# EAGLE board FPC_10pin0p5mm (EAGLE 9.5.0)
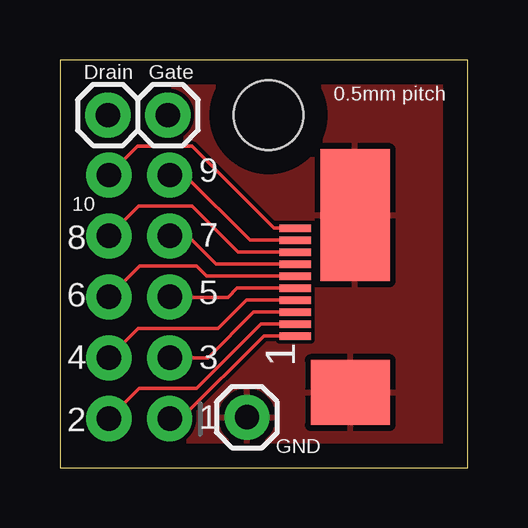
[diagram p0: board, top side]
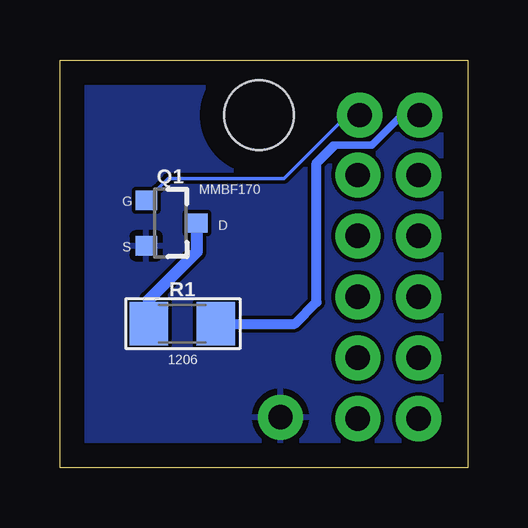
[diagram p1: board, bottom side, seen from below]

Size 17 x 17 mm. Coordinates in mm from the lower left corner, seen from the top.
Outline: 0,0 17,0 17,17 0,17 0,0
Copper layers (1*16): Top 0.035mm / dielectric 1.5mm / Bottom 0.035mm
Design rules "default": minimum track width 6mil, minimum drill 0.35mm, track to track 6mil, track to pad 6mil, pad to pad 6mil, via to via 6mil, smd to smd 6mil, copper to edge 40mil, drill to drill 6mil, minimum pad ring 10mil, minimum via ring 8mil, stop-mask expansion 4mil, vias tented up to drill 0mil, thermal gap 10mil
Holes 2.9 mm at 8.7,14.7

## Footprints (pad centres in the part's own frame; a part is rotated, then mirrored left to right if it is on the bottom)
KYOCERA046288 = smd 0.3 x 1.3: P$1 0,0.65; P$2 0.5,0.65; P$3 1,0.65; P$4 1.5,0.65; P$5 2,0.65; P$6 2.5,0.65; P$7 3,0.65; P$8 3.5,0.65; P$9 4,0.65; P$10 4.5,0.65 | smd 2.7 x 3.3: P$11 -2.35,-1.65 | smd 5.5 x 2.9: P$12 5.05,-1.85
2X5_NOSILK = drill 1.016 pad 1.88: 1 0,0; 2 0,2.54; 3 2.54,0; 4 2.54,2.54; 5 5.08,0; 6 5.08,2.54; 7 7.62,0; 8 7.62,2.54; 9 10.16,0; 10 10.16,2.54
1X01 = drill 1.016 pad 1.88: 1 0,0
MMBF170 = smd 0.8 x 0.9: 1 -0.95,-1; 2 0.95,-1; 3 0,1.1
R1206 = smd 1.6 x 1.8: 1 -1.4,0; 2 1.4,0

## Placement (x,y rotation side)
J1  J1  [KYOCERA046288]  10.46,5.48 90 top
J2  J2  [2X5_NOSILK]  4.58,2.04 90 top
J3  J3  [1X01]  2,14.7 0 top
J4  J4  [1X01]  4.5,14.7 0 top
J5  J5  [1X01]  7.8,2.1 0 top
Q1  MMBF170  [MMBF170]  12.4,10.2 270 bottom
R1  1206  [R1206]  11.9,6 0 bottom

## Library data of the parts
J1 = Kyocera046288
J2-J5 = SparkFun-Connectors
Q1 = MMBF170
R1 = R1206

## Nets
GND: J1.P$11 J1.P$12 J5.1 Q1.2
N$1: J1.P$1 J2.1
N$2: J1.P$2 J2.2
N$3: J1.P$3 J2.3
N$4: J1.P$4 J2.4
N$5: J1.P$5 J2.5
N$6: J1.P$6 J2.6
N$7: J1.P$7 J2.7
N$8: J1.P$8 J2.8
N$9: J1.P$9 J2.9
N$10: J1.P$10 J2.10
N$11: Q1.3 R1.1
N$12: J3.1 R1.2
N$13: J4.1 Q1.1

## Tracks (layer width: path | path; a pad name or v marks a point on that pad's centre or on a via)
GND
  pour Top: 0,0 0,17 17,17 17,0
  pour Bottom: 0,0 0,17 17,17 17,0
N$1
  Top 0.152: J1.P$1 8.52,5.48 8.5,5.5 5.04,2.04 J2.1
N$2
  Top 0.152: J1.P$2 8.38,5.98 5.7,3.3 3.3,3.3 J2.2
N$3
  Top 0.152: J1.P$3 8.08,6.48 6.18,4.58 J2.3
N$4
  Top 0.152: J1.P$4 7.78,6.98 6.6,5.8 3.26,5.8 J2.4
N$5
  Top 0.152: J1.P$5 7.38,7.48 7,7.1 4.6,7.1 J2.5
N$6
  Top 0.152: J1.P$6 6.12,7.98 5.7,8.4 3.32,8.4 J2.6
N$7
  Top 0.152: J1.P$7 6.52,8.48 5.34,9.66 J2.7
N$8
  Top 0.152: J1.P$8 7.42,8.98 5.5,10.9 3.28,10.9 J2.8
N$9
  Top 0.152: J1.P$9 7.92,9.48 5.2,12.2 J2.9
N$10
  Top 0.152: J1.P$10 8.92,9.98 5.5,13.4 3.24,13.4 J2.10
N$11
  Bottom 0.508: Q1.3 11.3,9 13.3,7 R1.1
N$12
  Bottom 0.305: 5.6,13.4 5.54,13.46 3.98,13.46 2.74,14.7 J3.1
  Bottom 0.406: R1.2 7.2,6 6.3,6.9 6.3,12.7 5.6,13.4
N$13
  Bottom 0.152: J4.1 5,14.7 7.65,12.06 12.49,12.06 Q1.1

## Text on the board
tPlace: Drain | Gate | 0.5mm pitch | 9 | 10 | 8 | 7 | 6 | 5 | 4 | 3 | 2 | 1 | GND
bPlace: MMBF170 | G | D | S | 1206